# Altium PCB Booster_Board.PcbDoc
Units mil, origin at the board's own origin, x right, y up, seen from the top; angles counter-clockwise.
Board outline 6470 x 5160 mil, 2 copper layers (Top Layer, Bottom Layer); 86 components, 44 nets, 236 pads, 353 vias.
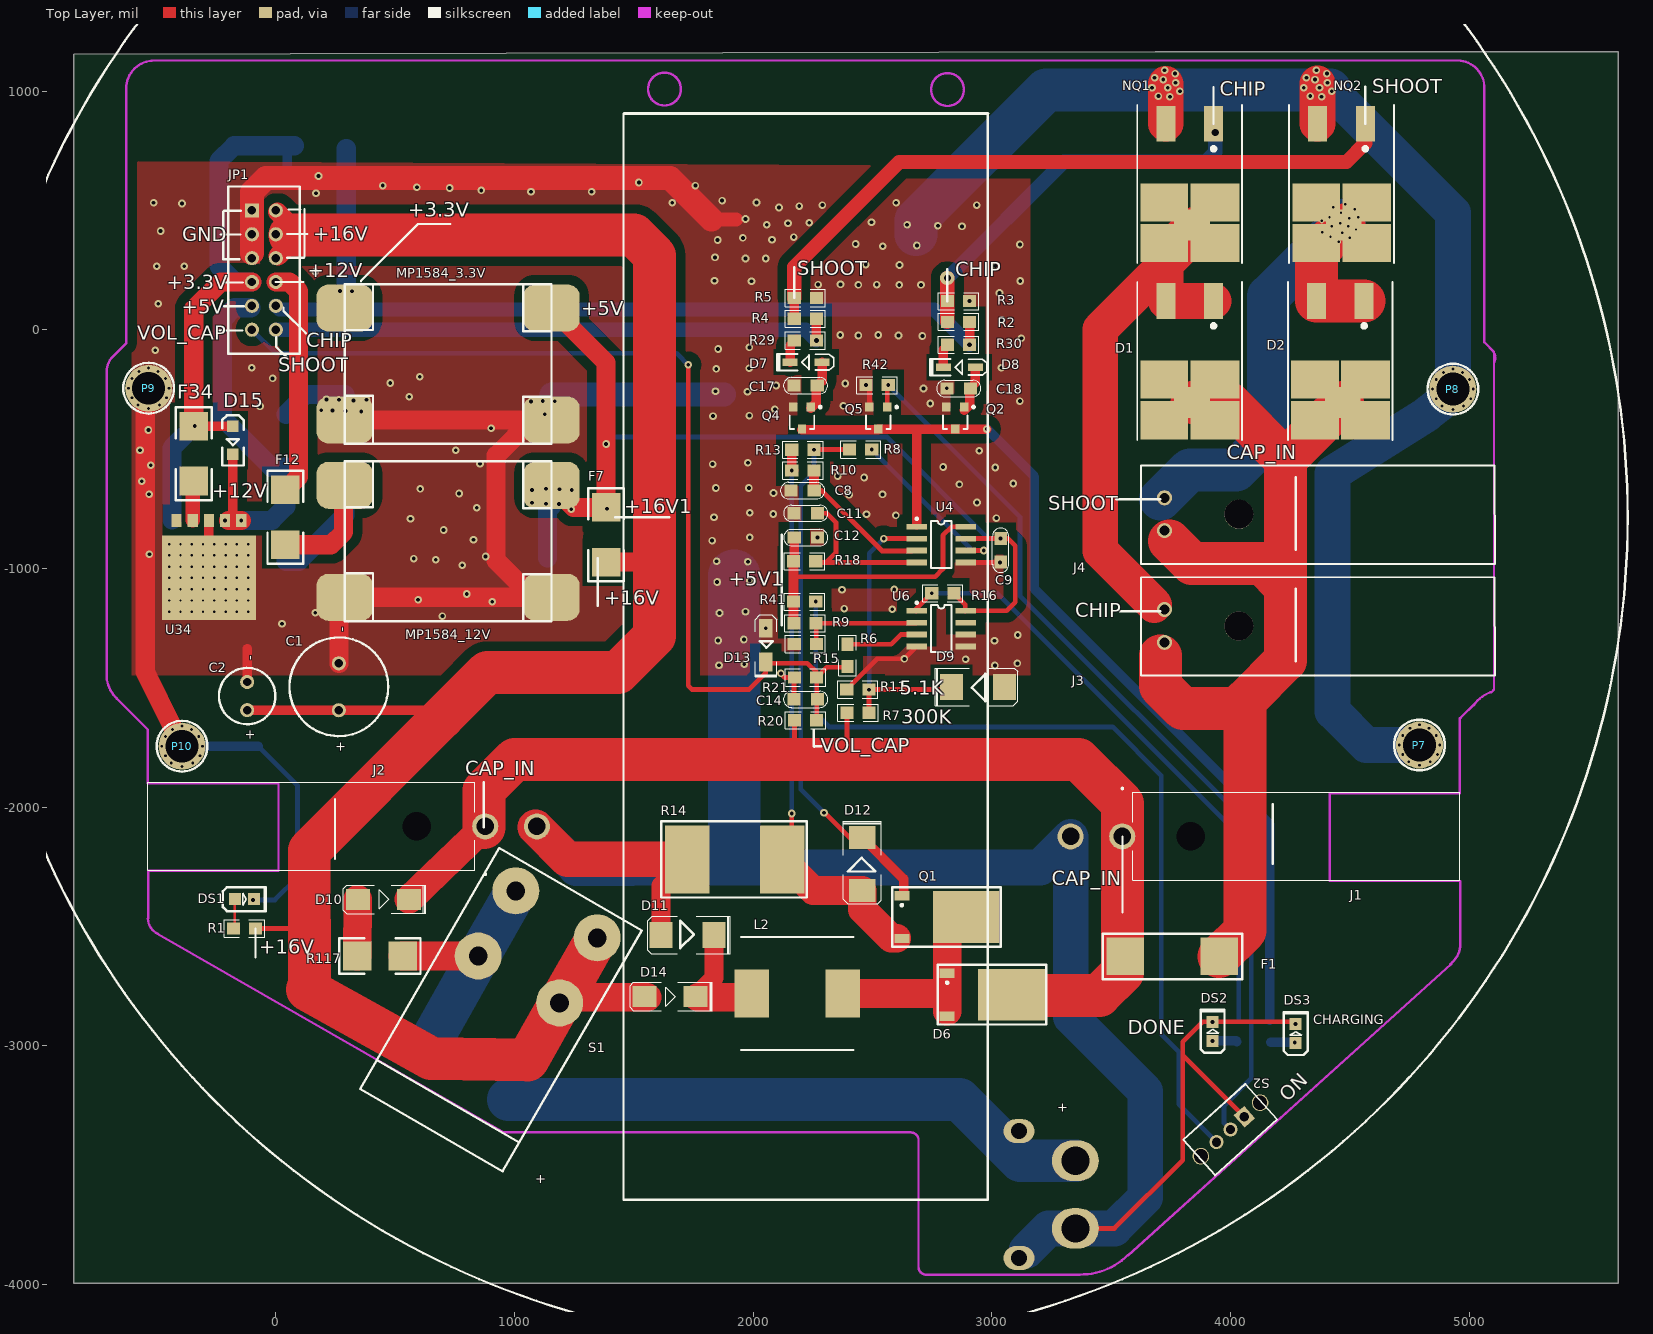
[diagram p0: Top Layer view]
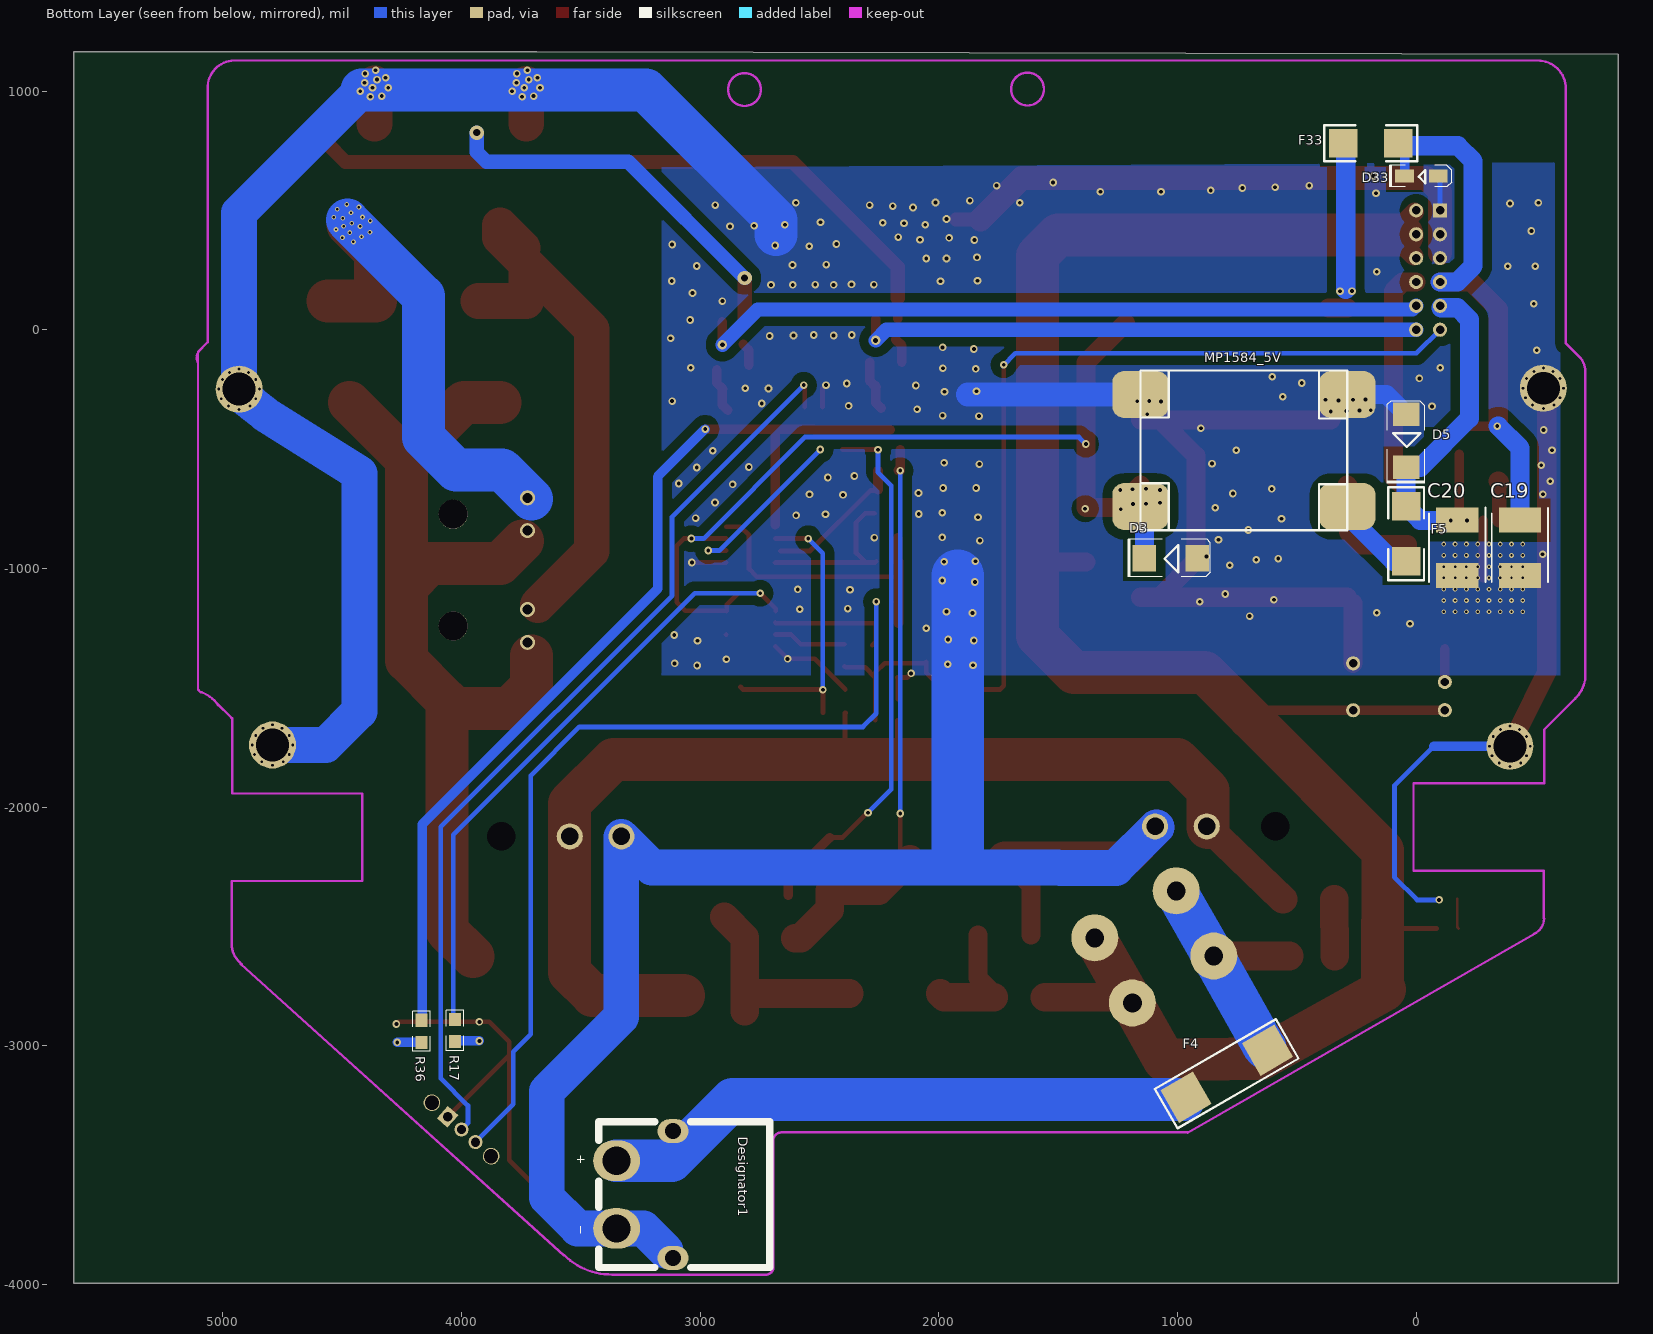
[diagram p1: Bottom Layer view, seen from below]

## Layer stack, top to bottom
Top Solder: solder mask 0.4, Solder Resist, Dk 3.5
Top Layer: signal copper 1.4
Dielectric1: dielectric 12.6, FR-4, Dk 4.8
Bottom Layer: signal copper 1.4
Bottom Solder: solder mask 0.4, Solder Resist, Dk 3.5

## Board outline
-845.99,1154 -845.99,-3996 914.01,-3996 5624.01,-3996 5624.01,-2476 5624.01,1164 3684.01,1164

## Design rules (kind name [scope] priority, off if disabled: settings)
Clearance [InNet('GND') And InPolygon] p1: gap=40 ignorepadtopadclearanceinfootprint=FALSE
Clearance Clearance_1 [All] p2: gap=10 ignorepadtopadclearanceinfootprint=FALSE except(0: Arc-Hole Track-Hole SMDPad-Hole THPad-Hole Via-Hole Fill-Hole Poly-Hole Region-Hole Text-Hole)
ComponentClearance [All] p1: gap=1 collisioncheckmode=3 verticalgap=10 showdistances=FALSE
FabricationTestPointUsage TestPointUsage [All] p1: valid=0 allowmultiple=FALSE
FabricationTestpoint Testpoint [All] p1: side=3 testpointundercomponent=TRUE minsize=40 maxsize=100 preferedsize=60 minholesize=0 maxholesize=40 preferedholesize=32 testpointgrid=1 allowsidetop=TRUE allowsidebottom=TRUE usegrid=TRUE gridtolerance=0.01
HoleSize [All] p1: absolutevalues=TRUE maxlimit=300 minlimit=1 maxpercent=80.000 minpercent=20.000
PolygonConnect [All] p1: connectstyle=Direct reliefconductorwidth=35 reliefentries=4 polygonreliefangle="90 Angle" airgapwidth=10
RoutingVias [All] p1: holewidth=28 width=50 viastyle="Through Hole" minholewidth=12 minwidth=25 maxholewidth=280 maxwidth=900
SilkToSolderMaskClearance SilkscreenOverComponentPads [IsPad] p1: minsilkscreentomaskgap=10 clearancetoexposedcopper=TRUE
SolderMaskExpansion [All] p1: expansion=4
Width [All] p1: maxlimit=300 minlimit=10 preferedwidth=80
25 further rules are at their usual default settings.

## Components (designator, comment, footprint, x,y, rotation, side; value= is the part's Value field where it differs from the comment)
C1 "330uF" 470uF 264.01,-1496 r90 top
C2 "100uf" 100uF -119.99,-1535 r90 top value=100uF
C8 "470p" 0805C 2252.01,-674.11 r180 top
C9 "0.1uF" 0805C 3037.01,-969 r90 top
C11 "2.2nf" 0805C 2265.01,-769.11 r180 top value=2.2nF
C12 "0.1uf" 0805C 2176.01,-871.11 r0 top value=0.1uF
C14 "0.1uF" 0805C 2175.01,-1548.41 r0 top
C17 "0.1uF" 0805c 2174.65,-234 r0 top
C18 "0.1uF" 0805c 2816.65,-246 r0 top
C19 "CAP470" CAPPM7360X200N -434.99,-914.14 r270 bottom
C20 "CAP470" CAPPM7360X200N -171.99,-913 r270 bottom
D1 "MBRB40250CT" D2PAK 3929.01,121 r90 top
D2 "MBRB40250CT" D2PAK 4560.01,121 r90 top
D3 "SMBJ18A" SMBJ6.5 937.01,-957 r180 bottom
D5 "SMBJ6.5CA" SMBJ6.5 42.01,-374 r90 bottom
D6 "MURD620" DPAK 2948.01,-2786 r270 top
D7 "B5819" sod-123 2289,-136 r0 top
D8 "B5819" sod-123 2931,-157 r0 top
D9 "SMBJ6.5CA" SMBJ6.5 3033.09,-1497 r0 top
D10 "M7" SMA 363.01,-2387 r180 top
D11 "SMBJ18A" SMBJ6.5 1634.01,-2536 r180 top
D12 "SMBJ18A" SMBJ6.5 2457.01,-2330.09 r270 top
D13 "SMF3.3" SMF33 2053.01,-1470.27 r90 top
D14 "M7" SMA 1564.2,-2794 r180 top
D15 "MBR120VLSFT1G SOD123" sod123 -179.99,-403.89 r270 top
D33 "SMF3.3" SMF33 126.69,644 r180 bottom
Designator1 "Comment" XT60PW 3350.23,-3477.02 r270 bottom locked
DS1 "LED2" 0805A -171.99,-2386 r0 top
DS2 "LED2" 0805A 3925.01,-2980 r90 top
DS3 "LED3" 0805A 4273.01,-2989 r90 top
F1 "20A" 20A 3684.01,-2646 r0 top
F4 "20A" 20A 741.01,-3064 r330 bottom
F5 "3A" 2512r 42.01,-740 r270 bottom
F7 "3A" 2512r 1384.01,-744 r270 top
F12 "3A" 2512r 40.01,-671 r270 top
F33 "3A" 2512r 75.01,781 r0 bottom
F34 "3A" 2512r -343.99,-634 r90 top
J1 "0768250002" 0768250002_version2 3546.61,-2123 r90 top locked
J2 "0768250002" 0768250002_version2 877.41,-2081 r270 top locked
J3 "172310-1102" 172310-1102_VERSION2 3723.59,-1309.9 r90 top locked
J4 "172310-1102" 172310-1102_VERSION2 3723.59,-841.9 r90 top locked
JP1 "Header 4X2" 2*6_2.5mm -100,500 r270 top locked
L2 "68uH" INDPM120120X1020N 2184.95,-2781 r0 top
MP1584_3.3V "MP1584" 1584 1155.01,-478 r180 top
MP1584_5V "MP1584" 1584 1155.01,-171 r180 bottom
MP1584_12V "MP1584" 1584 1155.01,-1221 r180 top
NQ1 "IPB64N25S3-20" D2PAK 3929.01,863 r90 top
NQ2 "IPB64N25S3-20" D2PAK 4565.01,863 r90 top
P7 "BNC" hole 4792,-1740 r0 top locked
P8 "BNC" hole 4932,-249 r0 top locked
P9 "BNC" hole -533,-245 r0 top locked
P10 "BNC" hole -393,-1745 r0 top locked
Q1 "IRFR12N25D" DPAK 2758.01,-2461 r270 top
Q2 "9014" SOT23A 2884.01,-324 r180 top
Q4 "9014" sot23a 2242.01,-324 r180 top
Q5 "9014" SOT23a 2561.81,-324 r180 top
R1 "10k" 0805R -177.99,-2509 r0 top
R2 "100" 0805r 2906.85,33 r180 top
R3 "10k" 0805R 2906.85,120 r180 top value=10K
R4 "100" 0805r 2264.85,46 r180 top
R5 "10k" 0805R 2264.85,133 r180 top value=10K
R6 "10K" 0805R 2395.01,-1318.11 r270 top value=10k
R7 "390K" 0805R 2486.01,-1605.11 r180 top
R8 "10" 0805R 2497.01,-502 r180 top
R9 "10K" 0805R 2264.01,-1230.11 r180 top value=10k
R10 "1k" 0805R 2162.01,-590.11 r0 top
R11 "3.3K" 0805R 2392.01,-1507.11 r0 top value=5.1K
R13 "10k" 0805R 2162.01,-503.11 r0 top
R14 "0.2" 0.2_4527R 1723.37,-2219 r0 top
R15 "1k" 0805R 2265.01,-1317.11 r180 top
R16 "4.7k" 0805R 2748.01,-1104.11 r0 top
R17 "4.7k" 0805R 4027.01,-2983 r90 bottom
R18 "27k" 0805R 2262.01,-970.11 r180 top
R20 "1m" 0805R 2266.01,-1636.41 r180 top value=1M
R21 "10k" 0805R 2173.01,-1457.41 r0 top value=10K
R29 "10K" 0805r 2171.85,-45 r0 top
R30 "10K" 0805r 2906.85,-63 r180 top
R36 "4.7K" 0805r 4168.01,-2986 r90 bottom value=4.7k
R41 "10k" 0805r 2262.01,-1139.11 r180 top
R42 "10k" 0805r 2566.01,-232 r180 top
R117 "20" 20_2512r 321.32,-2624 r0 top
S1 "power" Rocker_Switch 1005.49,-2351.24 r330 top locked
S2 "SW-SPDT" SMALL_switch 4058.52,-3298.31 r312 top
U4 "UC3843P" SO-G8 2788.01,-900.11 r270 top
U6 "LM393" LM393_SO-G8 2788.01,-1252.11 r270 top
U34 "BA33DD0WHFP" HRP5_16TO5 -279.99,-1040 r180 top

## Footprints (in the part's own frame and the unit in brackets; to place one, negate y for a bottom-side part, rotate by r counter-clockwise, add the part's x,y. Pads: shape width x height; smd on the part's side, far side on the other; paste and mask are expansions set on the pad)
0.2_4527R [mm]
  rect 4.74x7.25 smd: 1(0,0) 2(10.1,0)
  silkscreen extent -2.77,-4.06 12.72,4.06
2*6_2.5mm [mm] "16V 12V 5V 3.3V"
  rect 1.5x1.5 hole 0.9: 1(0,0)
  round 1.5 hole 0.9: 2(0,2.54) 3(2.54,0) 4(2.54,2.54) 5(5.08,0) 6(5.08,2.54) 7(7.62,0) 8(7.62,2.54) 9(10.16,0) 10(10.16,2.54) 11(12.7,0) 12(12.7,2.54)
  silkscreen extent -2.54,-2.54 15.24,5.08
20_2512r [mil] "Chip Resistor; Body 6.3 x 3.2 mm (LxW typ)"
  rect 120x120 smd: 1(19.68,0) 2(210.32,0)
  silkscreen extent -55,-75 285,75
20A [mm]
  rect 4x4 smd: 1(-3.175,0.508) 2(6.825,0.508)
  silkscreen extent -5.59,-1.91 9.27,2.92
100uF [mm] "6*12"
  round 1.5 hole 0.9: 1(-1.5,0) 2(1.5,0)
  silkscreen extent -3,-3 3,3
470uF [mm] "Capacitor (Radial); 2 Leads"
  round 1.5 hole 0.9: 1(-2.5,0) 2(2.5,0)
  silkscreen extent -5.25,-5.25 5.25,5.25
0805A [mil]
  rect 50x50 smd: 1(0,0) 2(80,0)
  silkscreen extent -50,-50 130,50
0805C [mm]
  rect 1.4x1.3 smd: 1(-0.102,0) 2(2.388,0)
  silkscreen extent -1.22,-0.88 3.49,0.87
0805c [mm]
  rect 1.4x1.3 smd: 1(-0.102,0) 2(2.388,0)
  silkscreen extent -1.22,-0.88 3.49,0.87
0805R [mm]
  rect 1.4x1.3 smd: 1(0,0) 2(2.362,0)
  silkscreen extent -0.97,-0.91 3.33,0.91
0805r [mm]
  rect 1.4x1.3 smd: 1(0,0) 2(2.362,0)
  silkscreen extent -0.97,-0.91 3.33,0.91
1584 [mm] "5V   3.3V 12V稳压模块"
  rrect50% 6x5 smd: 1(0,-2.54) 2(0,-14.46) 3(22,-14.46) 4(22,-2.54)
  silkscreen extent 0,-17 22,0
2512r [mil] "Chip Resistor; Body 6.3 x 3.2 mm (L"
  rect 120x120 smd: 1(0,0) 2(230,0)
  silkscreen extent -80,-75 310,75
172310-1102_VERSION2 [mm]
  round 1.61 hole 1.06: 1(0,0) 2(3.5,0)
  round 3.09 hole 3.09: MH1(1.75,-7.91)
  silkscreen extent -3.54,-35.16 6.93,2.5
0768250002_version2 [mm]
  round 2.775 hole 1.85: 1(0,0) 2(0,5.5)
  round 1.525 hole 3.05: MH1(0,-7.3)
  silkscreen extent -4.68,-35.93 5.2,0.1
CAPPM7360X200N [mm] "470uF贴片"
  rect 2.65x4.5 smd: 1(-2.95,0) 2(2.95,0)
  silkscreen extent -4.28,-3 3.65,3, body extent -3.65,-3 3.65,3, height 2
D2PAK [mil]
  rect 150x80 smd: 1(0,0) 3(0,200)
  rect 160x205 smd: 2(-500,-6) 2(-330,-6)
  rect 160x200 smd: 2(-500,206) 2(-330,206)
  rect 130x150 smd: 2(-425,90)
  silkscreen extent -583,-119 79,319
DPAK [mm] "D-PAK/TO-252-AA;"
  rect 1x1.6 smd: 1(-2.285,-3.425) 3(2.285,-3.425)
  rect 5.5x7.1 smd: 2(0,3.425)
  silkscreen extent -3.18,-4.45 3.18,7.11
hole [mm]
  round 5 hole 3.5: 1(0,0)
  silkscreen extent -2.7,-2.7 2.7,2.7
HRP5_16TO5 [mm]
  rect 1.07x1.37 smd: 1(-3.429,-6.125) 2(-1.709,-6.125) 3(0.011,-6.125) 4(1.731,-6.125) 5(3.451,-6.125)
  rect 10x9 smd: FIN(0,0)
INDPM120120X1020N [mm]
  rect 3.65x5.1 smd: 1(-4.85,0) 2(4.85,0)
  silkscreen extent -6,-6 6,6, body extent -6,-6 6,6, height 10.2
LM393_SO-G8 [mm] "Small Outline; 8 Leads; Body Width 3.9 mm; Pitch 1.27 mm"
  rect 0.6x2.2 smd: 1(-1.905,-2.6) 2(-0.635,-2.6) 3(0.635,-2.6) 4(1.905,-2.6) 5(1.905,2.6) 6(0.635,2.6) 7(-0.635,2.6) 8(-1.905,2.6)
  silkscreen extent -2.88,-2.72 2.5,1.1
Rocker_Switch [mm]
  round 5 hole 2: 1(10,0) 2(0,0) 3(10,-8) 4(0,-8)
  silkscreen extent -3.81,-26.55 13.72,3.05
SMA [mm]
  rect 2.56x2.2 smd: 1(0.5,0) 2(-4.948,0)
  silkscreen extent -6.73,-1.5 2.03,1.5
SMALL_switch [mm] "开关"
  round 1.778 hole 1.5: 0(0,2.25) 0(0,-6.25)
  rect 1.778x1.5 hole 1: 1(0,0)
  round 1.5 hole 1: 2(0,-2) 3(0,-4)
  silkscreen extent -2.54,-6.48 2.54,2.41
SMBJ6.5 [mm]
  rect 2.475x2.8 smd: 1(0.5,0) 2(-5.133,0)
  silkscreen extent -6.85,-2 1.91,2
SMF33 [mm] "TVS 二极管 3.3V"
  rect 2x1.4 smd: 1(5.58,0) 2(1.988,0)
  silkscreen extent 0.39,-1.14 6.98,1.14
SO-G8 [mm]
  rect 0.6x2.2 smd: 1(-1.905,-2.6) 2(-0.635,-2.6) 3(0.635,-2.6) 4(1.905,-2.6) 5(1.905,2.6) 6(0.635,2.6) 7(-0.635,2.6) 8(-1.905,2.6)
  silkscreen extent -2.88,-2.72 2.5,1.1
sod123 [mm]
  rect 1.25x1.22 smd: 1(0,0) 2(3,0)
  silkscreen extent -1.14,-1.14 4.19,1.14
sod-123 [mm]
  rect 1.6x0.8 smd: 1(0,0) 2(-3.4,0)
  silkscreen extent -4.83,-0.89 1.24,0.89
SOT23A [mm] "SOT-23; 3 Leads; Body 3.0 x 2.5 mm, inc. leads (LxW max)"
  rect 0.9x0.95 smd: 1(0,0) 2(1.9,0) 3(0.95,2.35)
  silkscreen extent -1.13,-0.12 2.25,2.35
sot23a [mm] "SOT-23; 3 Leads; Body 3.0 x 2.5 mm, inc. leads (LxW max)"
  rect 0.9x0.95 smd: 1(0,0) 2(1.9,0) 3(0.95,2.35)
  silkscreen extent -1.13,-0.12 2.25,2.35
SOT23a [mm] "SOT-23; 3 Leads; Body 3.0 x 2.5 mm, inc. leads (LxW max)"
  rect 0.9x0.95 smd: 1(0,0) 2(1.9,0) 3(0.95,2.35)
  silkscreen extent -1.13,-0.12 2.25,2.35
XT60PW [mm]
  oval 4.318x5 hole 3: 1(7.327,0) 2(0.127,0)
  oval 2.54x3.302 hole 1.7: 1(10.477,6) 2(-3.023,6)
  silkscreen extent -4.02,-4.17 11.48,16.29, body extent -4.04,-1.51 11.46,16.69, height 8.4

## Part data
C1: library part Cap2, "Capacitor", Published=23-Sep-2002, Publisher="Altium Limited"
C2: library part "Cap Pol1", "Polarized Capacitor (Radial)", Manufacturer="Generic Components", Class=Passive, Published=08/06/2000, Publisher="Altium Hobart Technology Centre", SubClass=Capacitor
C8 C11 C12: library part Cap, "Capacitor", Manufacturer="Generic Components", Class=Passive, Published=08/06/2000, Publisher="Altium Hobart Technology Centre", SubClass=Capacitor
C9 C14 C17 C18: library part Cap, "Capacitor", LatestRevisionDate=17-Jul-2002, LatestRevisionNote="Re-released for DXP Platform.", Published=8-Jun-2000, Publisher="Altium Limited"
C19 C20: library part T523H477M016APE0707280, "470uF电容贴片", Manufacturer_Name=Kemet, Mouser Part Number=80-T523H477M16P070LR, Datasheet Link=https://api.kemet.com/component-edge/download/datasheet/T523H477M016APE0707280.pdf, Height=2mm, Manufacturer_Part_Number=T523H477M016APE0707280, Mouser Price/Stock=https://www.mouser.com/Search/Refine.aspx?Keyword=80-T523H477M16P070LR
D1 D2 D6: library part MBRB1545CT, "Schottky Rectifier", Manufacturer="International Rectifier", Class=Discrete, Note="Terminal 2 is the TAB and is electrically connected to the cathode", Published=8/06/2000, Publisher="Altium Hobart Technology Centre", SubClass="Rectifier - Schottky"
D3 D5 D7 D8 D9 D11 D12 D13 D33: library part "D Zener", "Zener Diode", LatestRevisionDate=17-Jul-2002, LatestRevisionNote="Re-released for DXP Platform.", PackageReference=DIODE-0.7, Published=8-Jun-2000, Publisher="Altium Limited"
D10 D14 D15: library part Diode, "Default Diode", Manufacturer="Generic Components", Class=Discrete, Published=08/06/2000, Publisher="Altium Hobart Technology Centre", SubClass="Diode - Switching"
Designator1: library part "Header 2", "Header, 2-Pin", LatestRevisionDate=17-Jul-2002, LatestRevisionNote="Re-released for DXP Platform.", Publisher="Altium Limited"
DS1: "Typical RED, GREEN, YELLOW, AMBER GaAs LED", COLOUR=GREEN, Manufacturer="Generic Components", Class=Optoelectronic, Published=08/06/2000, Publisher="Altium Hobart Technology Centre", SubClass=LED
DS2: "Typical RED, GREEN, YELLOW, AMBER GaAs LED", Manufacturer="Generic Components", Class=Optoelectronic, Published=08/06/2000, Publisher="Altium Hobart Technology Centre", SubClass=LED
DS3: library part LED2, "Typical RED, GREEN, YELLOW, AMBER GaAs LED", COLOUR=GREEN, PackageDocument=Feb-2002, LatestRevisionDate=17-Jul-2002, LatestRevisionNote="Re-released for DXP Platform.", PackageReference=3.2X1.6X1.1, Published=8-Jun-2000, Publisher="Altium Limited"
F1: library part "Fuse 2", LatestRevisionDate=17-Jul-2002, LatestRevisionNote="Re-released for DXP Platform.", Published=8-Jun-2000, Publisher="Altium Limited"
F4: library part "Fuse 1", "Fuse", LatestRevisionDate=17-Jul-2002, LatestRevisionNote="Re-released for DXP Platform.", PackageReference=PIN-W2/E2.8, Published=8-Jun-2000, Publisher="Altium Limited"
F5 F7 F12 F33 R1 R6 R7 R8 R9 R10 R11 R13 R14 R15 R16 R17 R18 R20 R21 R29 R30 R36 R41 R42 R117: library part Res1, "Resistor", Manufacturer="Generic Components", Class=Passive, Published=08/06/2000, Publisher="Altium Hobart Technology Centre", SubClass=Resistor
F34: library part Res1, "Resistor", LatestRevisionDate=17-Jul-2002, LatestRevisionNote="Re-released for DXP Platform.", Published=8-Jun-2000, Publisher="Altium Limited"
J1 J2: "Connector", Manufacturer_Name=Molex, Mouser Part Number=N/A, Datasheet Link=https://www.molex.com/pdm_docs/sd/768250002_sd.pdf, Height=16mm, Manufacturer_Part_Number=0768250002, Mouser Price/Stock=https://www.mouser.com/Search/Refine.aspx?Keyword=N%2FA
J3 J4: "Connector", Manufacturer_Name=Molex, Mouser Part Number=538-172310-1102, RS Part Number=8951880, Allied_Number=70617676, Allied Price/Stock=http://www.alliedelec.com/molex-incorporated-172310-1102/70617676/, Datasheet Link=http://www.farnell.com/cad/1986622.pdf, Manufacturer_Part_Number=172310-1102, Mouser Price/Stock=https://www.mouser.com/Search/Refine.aspx?Keyword=538-172310-1102, RS Price/Stock=http://uk.rs-online.com/web/p/products/8951880
JP1: library part "Header 6X2", "Header, 4-Pin, Dual row", LatestRevisionDate=17-Jul-2002, LatestRevisionNote="Re-released for DXP Platform.", Publisher="Altium Limited"
L2: library part Inductor, "Inductor", Code_IEC=1005, Code_JEITA=0402, LatestRevisionDate=17-Jul-2002, LatestRevisionNote="Re-released for DXP Platform.", PackageReference=0402-A, Published=8-Jun-2000, Publisher="Altium Limited"
NQ1 NQ2: library part IRFP460, "HEXFET Power MOSFET", Manufacturer="International Rectifier", Class=Discrete, Note="Pin 2 is electrically connected to the Heatsink (4).", Published=8/06/2000, Publisher="Altium Hobart Technology Centre", SubClass="MOSFET - Power"
P7 P8 P9 P10: "BNC Elbow Connector", LatestRevisionDate=17-Jul-2002, LatestRevisionNote="Re-released for DXP Platform.", Publisher="Altium Limited"
Q1: library part NMOS-2, "N-Channel Power MOSFET", Code_JEDEC=TO-220-AB, DatasheetDocument=PD-9.814, LatestRevisionDate=17-Jul-2002, LatestRevisionNote="Re-released for DXP Platform.", Note="Pin 2 is electrically connected to pin 4.", PackageReference=TO-220AB, Published=8-Jun-2000, Publisher="Altium Limited"
Q2 Q4 Q5: library part BC817-40, "NPN General Purpose Amplifier", Manufacturer="Fairchild Semiconductor", Class=Discrete, Published=8/06/2000, Publisher="Altium Hobart Technology Centre", Revised="11-July-2000: SIM Model Added.", SubClass="BJT - Low Power"
R2 R3 R4 R5: library part "Res Semi", "Semiconductor Resistor", Manufacturer="Generic Components", Class=Passive, Published=08/06/2000, Publisher="Altium Hobart Technology Centre", SubClass=Resistor
S1: library part "Header 2X2", "Header, 2-Pin, Dual row", LatestRevisionDate=17-Jul-2002, LatestRevisionNote="Re-released for DXP Platform.", Publisher="Altium Limited"
S2: "SPDT Subminiature Toggle Switch, Right Angle Mounting, Vertical Actuation", ComponentLink1Description="Manufacturer Link", ComponentLink1URL=http://www.apem.com, DatasheetDocument=05-Dec-2000, LatestRevisionDate=17-Dec-2003, LatestRevisionNote="Schematic revised, PCB Footprint replaced.", PackageReference=TL36WW15050, Published=24-Mar-1999, Publisher="Altium Limited"
U4: "Current-Mode PWM Controller", PackageDocument=Jun-1999, Code_JEDEC=MO-001-AN, ComponentLink1Description="Manufacturer Link", ComponentLink1URL=http://www.ti.com/, DatasheetDocument=Dec-1999, LatestRevisionDate=6-Jun-2005, LatestRevisionNote="Stylized 3D Model Added.", PackageReference=P008, Published=15-Apr-2002, Publisher="Altium Limited"
U34: library part HRP5-16TO5

## Via types
v1: diameter 32, hole 16, Top Layer to Bottom Layer, 228 vias
v2: diameter 20, hole 10, Top Layer to Bottom Layer, 73 vias
v3: diameter 25, hole 12, Top Layer to Bottom Layer, 48 vias
v4: diameter 60, hole 30, Top Layer to Bottom Layer, 2 vias
v5: diameter 40, hole 20, Top Layer to Bottom Layer, 2 vias

## Nets (pads, with @x,y where several pads share a name; then routed paths per layer and width w, separated by ;. In a path a pad name is that pad's centre, name@x,y a point inside that pad or via, vN(x,y) a via of type N, cw(c..) or ccw(c..) an arc to the next point about the centre after c; other vN are vias at no path point)
+3.3V: C19.1 D15.1 D33.2 F33.1 F34.2 JP1.7 | length 2474.8
  Top Layer w40: F34.2 -343.88,-403.89 D15.1
  Top Layer w80: F34.2 -343.99,87 -230.99,200 JP1.7
  Bottom Layer w40: D33.2 48.43,754.42 65.01,771 F33.1
  Bottom Layer w80: C19.1 -434.99,-495 v1@-343.99,-404 ; JP1.7 -171.99,200 -238.99,267 -238.99,707 -174.99,771 65.01,771 F33.1@77.01,771
  other v1: -339.99,-403.89
+5V: C20.1 D5.2 D15.2 F5.1 JP1.9 U34.1 U34.2 | length 1573.4
  Top Layer w40: -179.99,-763.86 D15.2
  Top Layer w80: U34.2@-197.99,-798.86 v1(-144.99,-798.86)
  Bottom Layer w80: v1(-144.99,-798.86) -16.85,-798.86 F5.1 D5.2 -17.91,-576.09 -222.99,-371 -222.99,43 -173.99,92 JP1.9@-103.99,92
  other v1: -212.71,-798.86
+5V1: C12.1 R9.2 R18.2 R41.2 U4.8 | length 1261.4
  Top Layer w20: R9.2@2169.01,-1230.11 R9.2@2170.01,-1231.11 ; 2169.01,-1035 2762.12,-1035 2795.01,-1002.11 2795.01,-862.11 2832.01,-825.11 U4.8
  Top Layer w40: R9.2@2169.01,-1230.11 R41.2 ; R18.2 2169.01,-1035 2169.01,-1137.11 R41.2@2173.01,-1141.11 ; R18.2@2172.01,-977.11 C12.1
+12V: F12.1 JP1.8 | length 966.5
  Top Layer w80: JP1.8 57.01,200 95.01,162 95.01,-616 F12.1
+16V: C1.1 C2.1 D14.1 F7.2 JP1.2 JP1.4 JP1.6 R1.2 S1.1 S1.3 | length 8987.1
  Top Layer w20: R1.2 79.21,-2509
  Top Layer w40: C2.1 -119.62,-1594.43 C1.1 667.43,-1594.43 697.51,-1624.5 ; 79.21,-2509 89.19,-2499.02 ; 1569.01,-974 1587.01,-992
  Top Layer w80: JP1.2@7.5,492.5 82,418 60.01,396 75.01,381 75.01,375.01 JP1.6@9,309 ; F7.2 1569.01,-974
  Top Layer w120: S1.3@1190.4,-2821.66 1215.07,-2797 D14.1@1555.32,-2797
  Top Layer w180: 60.01,396 1501.01,396 1587.01,310 1587.01,-992 1587.01,-1283 1434.01,-1436 886.01,-1436 697.51,-1624.5 140.01,-2182 140.13,-2756.9 ; 131.82,-2765.21 134.64,-2766.78 651.01,-3053.59 1055.01,-3059 S1.3 ; S1.3@1190.4,-2821.66 S1.1@1345.7,-2547.67
+16V1: C9.2 D3.2 F7.1 MP1584_3.3V.2 MP1584_5V.2 MP1584_12V.2 R16.2 U4.7 U6.8 | length 3944.5
  Top Layer w20: R16.2 2888.37,-1151.47 U6.8@2888.37,-1178.11 ; U6.8 3062.74,-1177.11 3098.01,-1141.84 3098.01,-905 3068.01,-875 v1(3037.01,-875) 3036.9,-875.11 U4.7
  Top Layer w80: MP1584_12V.2 1247.3,-744 F7.1 v1(1384.01,-479) 1384.01,-137.71 MP1584_3.3V.2@1218.65,27.65
  Bottom Layer w20: v1(1384.01,-479) 1413.01,-450 2561.01,-450 2986.01,-875 v1(3037.01,-875)
  Bottom Layer w80: D3.2 1139.09,-756.2 MP1584_5V.2
  other v1: 1238.01,-752 1387.01,-749.91 1187.01,-730 1132.01,-729 1073.01,-725 1240.01,-672 1073.01,-671 1188.96,-668 1132.01,-666
BATTERY: Designator1.2 F4.2 | length 2482.7
  Bottom Layer w180: F4.2@974.01,-3225 2864.01,-3225 3121.02,-3482.02 Designator1.2@3350.23,-3482.02
BATTERY_IN: F4.1 R117.2 S1.2 S1.4 | length 1058
  Top Layer w120: R117.2 S1.4
  Bottom Layer w180: F4.1@634.23,-3007.63 850.77,-2625.57 S1.2@999.92,-2362.42
CHIP: JP1.10 R2.1 R30.1 | length 3058.2
  Top Layer w40: R30.1@2906.85,-50.85 R2.1
  Bottom Layer w60: JP1.10 15,85 2758.85,85 v5(2906.85,-63)
CMPEN: Q2.3 Q4.3 Q5.3 R36.2 U4.1 | length 4143.4
  Top Layer w20: 2683.65,-416.52 2685.65,-418.52
  Top Layer w40: Q4.3@2204.61,-418.52 Q5.3@2524.41,-418.52 ; Q5.3 2683.65,-416.52 Q2.3 v1(2979.01,-416.52) ; U4.1@2685.65,-817 2685.65,-418.52
  Bottom Layer w40: v1(2979.01,-416.52) 3178.01,-615.52 3178.01,-1086 4165.01,-2073 R36.2@4165.01,-2893
COIL_CHIP: D1.1 D1.3 J3.2 NQ1.2 | length 2335
  Top Layer w150: 3680.25,-1152.76 3454.01,-926.52 3454.01,2 3729.01,277 ; NQ1.2@3743.51,342.5 3839.01,438 3839.01,387 3729.01,277 ; D1.1 D1.3 3729.01,277
COIL_SHOOT: D2.1 D2.3 J4.2 NQ2.2 | length 2167.1
  Top Layer w180: NQ2.2@4475.01,438 4360.01,323 D2.3 D2.1
  Bottom Layer w180: J4.2@3706.59,-710.1 3829.69,-587 4024.01,-587 4160.01,-451 4160.01,141 4478.01,459
  other v2: 4453.01,368 4499.01,386 4419.01,390 4468.01,407 4384.01,408 4526.01,420 4425.01,433 4494.01,434 4460.01,446 4382.01,456 4498.01,467 4535.01,471 4415.01,472 4463.01,490 4521.01,505 4430.01,514 4481.01,525
CURRENT: C8.1 R10.2 U4.3 | length 592.2
  Top Layer w20: C8.1 2287.01,-674.11 2540.01,-927.11 U4.3@2663.01,-927.11
  Top Layer w40: C8.1@2254.01,-670.11 2255.01,-669.11 R10.2
GND: C1.2 C2.2 C8.2 C9.1 C11.2 C12.2 C14.1 C17.1 C18.1 C19.2 C20.2 D3.1 D5.1 D9.1 D11.1 D13.1 D33.1 Designator1.1 DS1.2 DS2.2 DS3.2 J1.2 J2.2 JP1.1 JP1.3 JP1.5 MP1584_3.3V.1 MP1584_3.3V.4 MP1584_5V.1 MP1584_5V.4 MP1584_12V.1 MP1584_12V.4 NQ1.3 NQ2.3 P7.1 P8.1 P9.1 P10.1 Q2.2 Q4.2 Q5.2 R3.1 R5.1 R11.1 R14.1 R15.2 R21.1 R42.2 S2.1 U4.5 U6.4 U6.5 U6.6 U34.3 U34.FIN | length 24948.5
  Top Layer w20: P10.1 P10.1@-366.99,-1771 ; U34.FIN@-280.43,-1039.57 U34.FIN ; v1(2116.01,-1440) 2133.42,-1457.41 R21.1 2171.01,-1459.41 C14.1 ; R11.1 2520.12,-1379 v1(2633.76,-1379) U6.4 ; v1(2473.01,-232) 2487.01,-246 Q5.2 ; U6.6 U6.6@2891.69,-1278.43 ; U4.5 v1(3034.9,-975.11) C9.1 ; Designator1.1@3350.23,-3765.48 3513.53,-3765.48 3800.01,-3479 3800.01,-3039.8 ; S2.1 3800.01,-3039.8 ; v1(4273.01,-2909) 4264.01,-2900 v1(3925.01,-2900) 3884.01,-2900 3800.01,-2984 3800.01,-3039.8
  Top Layer w40: U34.FIN@-280.43,-1039.57 -280.43,-898.27 U34.3 ; C2.2 -119.99,-1336
  Top Layer w60: MP1584_12V.4@264.01,-1145.86 MP1584_12V.4 ; 1826.01,462 1928.01,462
  Top Layer w80: P9.1@-546.99,-199.61 -546.99,-420 -546.99,-568 -546.99,-1433 -428.61,-1672.83 -426.73,-1676.65 -422.58,-1685.05 P10.1 ; C1.2 MP1584_12V.4@264.01,-1145.86 ; MP1584_12V.4 MP1584_12V.1@1077.01,-1121 ; MP1584_3.3V.4@358.01,-378 MP1584_3.3V.1@1072.49,-378 ; MP1584_12V.1 MP1584_12V.1@1077.01,-1121 ; MP1584_3.3V.1 MP1584_3.3V.1@1072.49,-378 ; D11.1 1614.32,-2328.05 R14.1 ; MP1584_3.3V.1@1072.49,-378 923.01,-527.48 923.01,-967 MP1584_12V.1@1077.01,-1121
  Top Layer w100: JP1.5@-100,322 JP1.3 JP1.1 -100,577.31 -41.31,636 178.55,636 1323.01,636 1652.01,636 1826.01,462
  Top Layer w150: J2.2@1087.94,-2085 1221.94,-2219 R14.1 ; NQ1.3 3729.01,979 3729.01,1030 ; NQ2.3 4365.01,979 4365.01,1032
  Bottom Layer w20: P10.1 v3(-308,-1745) ; JP1.1 -100,636.99 D33.1 ; v1(-95.99,-2389) -3.99,-2389 91.01,-2294 91.01,-1910 -73.99,-1745
  Bottom Layer w40: v3(-308,-1745) -73.99,-1745
  Bottom Layer w80: D5.1 125.32,-271 MP1584_5V.4
  Bottom Layer w100: MP1584_5V.1 1879.01,-271
  Bottom Layer w150: J2.2@1087.94,-2085 1257.94,-2255 1491.01,-2255 ; 1503.01,-2253 3203.07,-2253 3331.07,-2125 3331.07,-2879.06 3643.01,-3191 3643.01,-3636 3513.53,-3765.48 3350.23,-3765.48 3238.02,-3765.48 Designator1.1@3144.76,-3858.75 ; v1@4418.01,1004 4932.01,490 4932.01,-264 4931.69,-251.06 4931.65,-249.01 4931.6,-246.95 4931.02,-223 4930.63,-224.67 4925.42,-247.5 4921.21,-265.94 4918.58,-277.47 4899.23,-292.9 4888.7,-301.3 P8.1@4879.03,-309.01 ; P7.1 v3(4707,-1740) 4569.01,-1740 4428.01,-1599 4428.01,-601.78 4823.41,-353.36 4878.37,-309.53 P8.1@4879.03,-309.01
  Bottom Layer w180: 2683.01,398 2683.01,460 3227.01,1004 3671.01,1004 3737.01,1004 4307.01,1004 4404.01,1004 v1@4418.01,1004
  Bottom Layer w220: 1920.01,-2171 1920.01,-1298 1920.01,-1181 1920.01,-1051 1920.01,-1030
  other v1: 3013.01,-1407 1857.01,-1406 1963.01,-1402 3107.01,-1398 2890.37,-1381 3011.01,-1303 1853.01,-1302 1961.01,-1298 3109.01,-1279 2053.01,-1250.58 26.01,-1232 698.01,-1200 1859.01,-1187 165.01,-1186 1968.01,-1181 2583.01,-1171 2382.01,-1168.47 907.01,-1140 596.01,-1131 800.01,-1107 2372.01,-1089.49 2591.01,-1088 1849.01,-1057 1985.45,-1051 781.24,-987 1977.84,-972.17 1847.01,-970.11 670.01,-964 578.01,-959 879.01,-950 -529.99,-941 1828.01,-883.73 828.01,-880 2270.01,-871.11 1985.45,-870 703.01,-839 564.01,-792 3019.01,-789.45 1836.01,-786 2598.01,-778 2475.01,-773 2084.01,-772 1985.45,-767 842.01,-746 2938.01,-724 2401.33,-691.84 2542.01,-690 -530.99,-689 768.01,-686 2085.01,-684 605.01,-667 1844.01,-663 1982.01,-663 2864.29,-648 3090.01,-644 -561.99,-635 2465.01,-619 2354.01,-613 3014.01,-577 2796.01,-575 -523.99,-568 1830.01,-563 855.51,-561 1977.84,-557 2947.01,-507 -568.99,-505 754.01,-505 -533.99,-420 902.01,-413 1832.01,-362 1984.01,-360 1127.01,-354 358.01,-342 292.01,-340 238.01,-339 190.01,-337 2091.01,-333 -66.15,-321 2378.01,-319 2742.01,-309 1069.01,-301 1169.01,-300 1118.01,-299 3117.72,-299 325.01,-297 264.01,-293 380.01,-293 212.01,-292 559.01,-281.15 1976.01,-260 1842.01,-258 2714.01,-246 2811.01,-245 2096.01,-233.77 2386.01,-225 479.01,-223 -13.63,-204 603.01,-197 1845.01,-164 1983.01,-161 -100.57,-159 3039.3,-159 -504.99,-86 1853.01,-81 1984.01,-74 3124.01,-36 2709.01,-26 2441.01,-24 2609.01,-24 2365.01,-22 2524.01,-22 3042.01,41 -492.99,109 2906.85,120 3032.01,154 2441.01,188 2612.01,188 2703.01,188 2272.01,189 2518.01,189 2366.01,190 1993.01,203 3119.01,204 1838.01,205 165.01,243 -498.99,266 -383.99,266 3014.01,267 2613.01,271 2472.01,273 1968.01,298.51 2053.01,298.51 1840.01,303 2543.01,350 2686.01,353 3117.72,357 2429.33,359 1851.01,376 2079.01,377 1957.01,385 2170.01,388 -482.99,413.63 2875.01,433 2773.91,436 2057.01,440 2645.01,440 2146.15,446 2235.01,448 2496.01,450 1968.01,464 2108.01,512 2193.01,518 2290.01,522 2937.01,522 -392.99,529 -511.99,532 1661.01,532 2599.01,532 2014.01,533 1870.01,541 168.01,572 1069.01,578 1323.01,578 861.01,584 728.01,594 591.01,597 448.01,604 1758.01,604 1521.01,617 178.55,644 3746.01,976 4382.01,976 3698.01,979 4334.01,979 3788.01,999 4424.01,999 3671.01,1014 3737.01,1014 4307.01,1014 4373.01,1014 3770.01,1035 4406.01,1035 3718.01,1048 4354.01,1048 3682.01,1056 4318.01,1056 3768.01,1073 4404.01,1073 3724.01,1087 4360.01,1087
  other v2: -446.72,-1181.73 -399.48,-1181.73 -352.24,-1181.73 -304.99,-1181.73 -257.75,-1181.73 -210.5,-1181.73 -163.26,-1181.73 -116.02,-1181.73 -446.72,-1134.49 -399.48,-1134.49 -352.24,-1134.49 -304.99,-1134.49 -257.75,-1134.49 -210.5,-1134.49 -163.26,-1134.49 -116.02,-1134.49 -446.72,-1087.24 -399.48,-1087.24 -352.24,-1087.24 -304.99,-1087.24 -257.75,-1087.24 -210.5,-1087.24 -163.26,-1087.24 -116.02,-1087.24 -446.72,-1040 -399.48,-1040 -352.24,-1040 -304.99,-1040 -257.75,-1040 -210.5,-1040 -163.26,-1040 -116.02,-1040 -446.72,-992.76 -399.48,-992.76 -352.24,-992.76 -304.99,-992.76 -257.75,-992.76 -210.5,-992.76 -163.26,-992.76 -116.02,-992.76 -446.72,-945.51 -399.48,-945.51 -352.24,-945.51 -304.99,-945.51 -257.75,-945.51 -210.5,-945.51 -163.26,-945.51 -116.02,-945.51 -446.72,-898.27 -399.48,-898.27 -352.24,-898.27 -304.99,-898.27 -257.75,-898.27 -210.5,-898.27 -163.26,-898.27 -116.02,-898.27
  other v3: -393,-1830 4792,-1825 -438,-1815 -348,-1815 4747,-1810 4837,-1810 -463,-1785 -318,-1785 4722,-1780 4867,-1780 -478,-1745 4877,-1740 -463,-1705 -323,-1705 4722,-1700 4862,-1700 -433,-1675 -353,-1675 4752,-1670 4832,-1670 -393,-1660 4792,-1655 4932,-334 -533,-330 4887,-319 4977,-319 -578,-315 -488,-315 4862,-289 5007,-289 -603,-285 -458,-285 4847,-249 5017,-249 -618,-245 -448,-245 4862,-209 5002,-209 -603,-205 -463,-205 4892,-179 4972,-179 -573,-175 -493,-175 4932,-164 -533,-160
NetC11_1: C11.1 R18.1 U4.4 | length 704.4
  Top Layer w20: R18.1 2267.01,-975.11 2307.01,-975.11 ; C11.1 2309.01,-769.11 2347.01,-807.11 2347.01,-935.11 2307.01,-975.11 ; U4.4@2685.65,-976.11 U4.4@2686.01,-976.11 ; U4.4 2307.01,-975.11
NetC17_2: C17.2 D7.1 Q4.1 | length 219.1
  Top Layer w40: Q4.1@2242.01,-328 2264.65,-305.35 C17.2@2264.65,-239.35 ; C17.2@2263.01,-241 C17.2@2264.65,-239.35 ; C17.2@2264.65,-234 C17.2@2264.65,-239.35 ; D7.1 2289,-215 C17.2@2264.65,-239.35
NetC18_2: C18.2 D8.1 Q2.1 | length 190.4
  Top Layer w40: Q2.1@2885.01,-337 2906.65,-315.35 C18.2@2906.65,-246.35 ; C18.2@2905.01,-248 C18.2@2906.65,-246.35 ; D8.1@2931,-168 2931,-222 C18.2@2906.65,-246.35
NetD6_1: D6.1 D6.3 L2.2 Q1.2 | length 859.2
  Top Layer w120: L2.2 2803.17,-2781 ; 2813.17,-2856 D6.1 2813.17,-2546.69 Q1.2@2899.85,-2460
NetD7_2: D7.2 R29.1 | length 105.7
  Top Layer w40: D7.2 2155.14,-66.86 R29.1@2181.01,-41
NetD8_2: D8.2 R30.2 | length 97.5
  Top Layer w40: D8.2@2797.14,-149 2797.14,-83.86 R30.2@2820.01,-61
NetD10_1: D10.1 R117.1 | length 237
  Top Layer w120: R117.1 D10.1
NetD11_2: D11.2 D14.2 L2.1 | length 520.8
  Top Layer w80: D14.2 1836.09,-2716.91 D11.2
  Top Layer w120: D14.2@1769.81,-2797 1978.01,-2797 L2.1
NetD12_1: D12.1 Q1.3 R10.1 R13.1 R14.2 | length 2403.7
  Top Layer w20: R14.2 2162.01,-2178 v1(2162.01,-2027)
  Top Layer w40: v1(2162.01,-590.11) R10.1@2167.01,-590.11 ; R13.1 2162.01,-581.11 R10.1@2170.01,-589.11
  Top Layer w120: R14.2 2251.78,-2349.77 D12.1 2457.01,-2429 2577.97,-2549.96 Q1.3@2601.01,-2549.96
  Bottom Layer w20: v1(2162.01,-2027) 2162.01,-671.11 v1(2162.01,-590.11)
NetD12_2: D12.2 Q1.1 R8.2 R13.2 | length 2251
  Top Layer w20: v1(2255.01,-503.11) 2256.12,-502 R8.2 ; v1(2297.01,-2024) 2300.01,-2024 2404.01,-2128 D12.2
  Top Layer w40: D12.2 2630.17,-2301.16 Q1.1@2630.17,-2370.04
  Bottom Layer w20: v1(2255.01,-503.11) 2255.01,-597.11 2199.01,-653.11 2199.01,-1926 v1(2297.01,-2024)
NetDS1_1: DS1.1 R1.1 | length 125.5
  Top Layer w12: R1.1 -171.99,-2503 DS1.1
NetDS2_1: DS2.1 R17.1 | length 103.2
  Bottom Layer w40: v1(3925.01,-2980) 4024.01,-2980 R17.1
NetDS3_1: DS3.1 R36.1 | length 101
  Bottom Layer w40: R36.1 v1(4269.01,-2986)
NetF5_2: F5.2 MP1584_5V.3 | length 363.6
  Bottom Layer w80: F5.2 96.01,-970 288.87,-777.14 MP1584_5V.3
NetF12_2: F12.2 MP1584_12V.3 | length 468.3
  Top Layer w80: F12.2@36.01,-901 231.01,-901 284.01,-848 284.01,-656.57 MP1584_12V.3
NetF33_2: F33.2 MP1584_3.3V.3 | length 670.4
  Top Layer w80: MP1584_3.3V.3 MP1584_3.3V.3@367.3,91.29
  Bottom Layer w80: 295.01,168 F33.2@295.01,760
  other v1: 319.01,161 269.01,162
NetF34_1: F34.1 U34.4 | length 166.6
  Top Layer w60: U34.4 F34.1@-348.14,-638.15
  Top Layer w80: F34.1@-348.14,-638.15 F34.1
NetNQ1_1: NQ1.1 R2.2 R3.2 | length 1605.7
  Top Layer w60: R2.2 R3.2 v4(2813.85,216.8)
  Bottom Layer w60: v4(2813.85,216.8) 3301.05,704 3895.01,704 3936.01,745 v4(3936.01,826)
NetNQ2_1: NQ2.1 R4.2 R5.2 | length 2913.1
  Top Layer w40: R5.2@2171.01,113 R5.2@2171.85,113.85 ; R4.2 R5.2@2171.85,113.85 ; R5.2 R5.2@2171.85,113.85 ; R5.2@2176.01,118 R5.2@2171.85,113.85
  Top Layer w60: R5.2 2171.85,262.85 2612.01,703 4486.01,703 4565.01,782 NQ2.1
NetQ5_1: Q5.1 R42.1 S2.2 | length 3901.2
  Top Layer w20: Q5.1 2561.81,-236.2 v1(2566.01,-232)
  Bottom Layer w20: v1(2566.01,-232) 3118.01,-784 3118.01,-1114 4087.01,-2083 4087.01,-3137 3973.01,-3251 3973.01,-3324 S2.2
NetR6_1: R6.1 U6.3 | length 307.6
  Top Layer w20: R6.1 2578.01,-1318.11 2619.01,-1277.11 U6.3
NetR9_1: R9.1 R15.1 U6.2 | length 521.1
  Top Layer w20: R15.1@2279.01,-1322.11 2264.01,-1307.11 R9.1 2682.65,-1230.11 U6.2
NetR16_1: R16.1 R17.2 U6.1 | length 2590.2
  Top Layer w20: U6.1@2683.65,-1178.11 2683.65,-1168.47 v1(2748.01,-1104.11)
  Bottom Layer w20: v1(2748.01,-1104.11) 3022.12,-1104.11 4035.01,-2117 R17.2@4035.01,-2900
NetR41_1: R41.1 S2.3 | length 3656.2
  Bottom Layer w20: v1(2262.01,-1139.11) 2262.01,-1608 2318.01,-1664 3506.01,-1664 3710.01,-1868 3710.01,-2952 3783.01,-3025 3783.01,-3245.2 S2.3
PWMOUT: R8.1 U4.6 | length 719.9
  Top Layer w20: U4.6 v1(2966.01,-925.11)
  Bottom Layer w20: v1(2497.01,-502) 2920.12,-925.11 v1(2966.01,-925.11)
SHOOT: JP1.12 R4.1 R29.2 | length 2374.5
  Top Layer w40: v5(2264.85,-45) R4.1
  Bottom Layer w60: JP1.12 2219.85,0 v5(2264.85,-45)
VBACK: D9.2 R7.1 R11.2 U4.2 | length 1245.5
  Top Layer w20: R7.1 2485.01,-1604.11 R11.2 2820.9,-1507.11 D9.2 ; v1(2547.01,-875.11) U4.2
  Bottom Layer w20: v1(2486.01,-1508.11) 2486.01,-936.11 v1(2547.01,-875.11)
VCAP_IN: D6.2 D10.2 F1.1 J1.1 J2.1 R7.2 R20.2 | length 5184.4
  Top Layer w20: 1660.01,-1800 1665.01,-1795 1665.01,-1730 ; R20.2 2173.01,-1746.11 2172.01,-1747.11 2381.9,-1747.11 2393.01,-1736 R7.2 ; 2281.01,-1800 2295.01,-1786 ; R7.2@2390.01,-1606.11 R7.2@2391.01,-1605.11
  Top Layer w120: D10.2 J2.1@871.41,-2085
  Top Layer w180: J2.1@871.41,-2085 871.41,-1929.6 1001.01,-1800 1660.01,-1800 2281.01,-1800 3363.01,-1800 3547.61,-1984.6 3547.61,-2125 3547.61,-2692.4 3451.01,-2789 D6.2@3069.01,-2789
VCAP_OUT: D1.2 D2.2 F1.2 J3.1 J4.1 | length 4127.1
  Top Layer w180: 3706.59,-1366 3706.59,-1493.58 3801.01,-1588 4027.01,-1588 4061.01,-1554 ; 3743.85,-885.16 3837.69,-979 4133.01,-979 4230.01,-1076 ; D1.2@3839.01,-304 3990.01,-304 4230.01,-544 ; F1.2 4061.01,-2517.7 4061.01,-1554 ; D2.2@4470.01,-304 4230.01,-544 ; 4061.01,-1554 4230.01,-1385 4230.01,-1076 ; 4230.01,-1076 4230.01,-544
VOLTAGE_CAP: C14.2 D13.2 JP1.11 R6.2 R20.1 R21.2 | length 4225.5
  Top Layer w20: v1(1728.01,-147) 1728.01,-1492 1743.01,-1507 1984.01,-1507 2053.01,-1438 D13.2 2058.12,-1397.11 2227.01,-1397.11 2266.01,-1436.11 R21.2 ; R20.1 R21.2 ; R6.2 2392.01,-1414.11 2309.31,-1414.11 R21.2
  Bottom Layer w20: JP1.11 -1,-99 1679.01,-99 v1@1732.01,-152
pads on no net: J1.MH1 J2.MH1 J3.MH1 J4.MH1 S2.0 U6.7 U34.5

## Polygon pours and split planes (outlines as drawn)
GND on Bottom Layer "GND_L02_P039" (solid, remove dead copper, pour order 39): -602.99,701.01 -602.99,-1447 3167.01,-1447 3160.01,-1440 3160.01,681.07
GND on Top Layer "GND_L01_P041" (solid, remove dead copper, pour order 41): -602.99,705.05 -602.99,-1447 3167.01,-1447 3160.01,-1440 3160.01,685.11

## Keep-outs
Keep-Out Layer:
  circle w10: c2814.3,1006.43 r68.9
  circle w10: c1628.46,1008.43 r68.9
  lines w10: -665.99,-1546 -535.99,-1676 -535.99,-1900 11.23,-1900 ; -665.67,-1545.66 cw(c-571.99,-1445) -707.73,-1467 -707.73,-176 cw(c-625.69,-171) -690.69,-120.7 -625.99,-56 -625.99,1024.49 ; -626.49,1008.99 cw(c-510.51,1012) -507.99,1128 ; -535.99,-2468 ccw(c-465.49,-2466.5) -494.95,-2530.57 ; -533.99,-2466 -533.99,-2267 11.23,-2267 11.23,-1906 ; -522.48,1128 4953.01,1128 cw(c4950.01,1014) 5064.01,1011 5064.01,244 ; -495.34,-2531.24 958.31,-3365.07 ; 959.74,-3362.58 2135.01,-3362.58 ; 2133.23,-3362.89 2660.57,-3362.89 ; 2660.57,-3363.37 cw(c2659.9,-3396.33) 2692.86,-3397 2692.86,-3926.37 ccw(c2725.82,-3927.04) 2725.15,-3960 3369.01,-3960 ; 3367.04,-3958.45 ccw(c3373.01,-3679) 3569.69,-3877.62 ; 3570.94,-3879 4924.36,-2658.75 ; 4416.14,-2310 4963.36,-2310 4963.36,-2572.79 ; 4416.14,-2304 4416.14,-1943 4961.36,-1943 4961.36,-1628.65 ; 4921.12,-2657.84 ccw(c4857.51,-2573.5) 4963.15,-2572.99 ; 4964.34,-1625.67 5024.01,-1566 ; 5017.83,-1574.39 cw(c5139.64,-1658.46) 5089.02,-1519.38 ; 5064.01,284 5064.01,-52.61 5104.01,-92.61 5104.01,-1507.89 5092.39,-1519.5 ; 5090.56,-79.16 cw(c5060.15,-118.22) 5106.48,-135.66

## Other copper
Top Layer:
  pour cut-out: 1289.01,-831 1293.01,-827 1476.01,-827 1476.01,-880 1461.01,-895 1453.01,-887 1284.01,-887
  pour cut-out: -444.99,-474 -233.99,-474 -227.99,-480 -227.99,-554.74 -441.73,-554.74 -444.99,-558
  pour cut-out: -137.99,-716 -134.99,-719 226.01,-719 226.01,-896 193.01,-863 -141.99,-863
Bottom Layer:
  pour cut-out: -389.99,-408 -388.99,-407 -31.99,-407 -31.99,-885 -34.99,-888 -363.99,-888

## Silkscreen, mask and mechanical layers (free items; w line width, h text height)
Top Overlay:
  circle w10: c2199.68,-786.43 r3464.57
  lines w10: -236.99,-3 -139.99,-3 ; -230.99,399 -148.31,399 ; -215.99,98 -134.99,98 ; -214.1,198 -138.99,198 ; -152.99,296 -201.99,296 -202.99,295 -219.99,295 -219.99,495 -216.99,498 -146.99,498 ; -84.99,-2630 -84.99,-2509 ; 0,200 116.01,200 ; 2.01,-32 2.01,-72 44.01,-114 ; 32.01,92 32.01,79 126.01,-15 ; 46.99,302 116.99,302 ; 48.31,401 130.99,401 ; 52.99,504 101.99,504 ; 119.99,305 119.99,505 ; 357.01,202 357.01,205 595.01,443 731.01,443 ; 871.41,-2085 871.41,-1896.6 ; 1349.01,-1156 1349.01,-958 ; 1421.01,-786.43 1649.44,-786.43 ; 1456.9,-3644.84 2983.75,-3645 ; 1456.9,-3640 1456.9,904 ; 2119.01,-1239 2119.01,-859 ; 2171.85,133 2171.85,262.85 ; 2254.01,-1677 2254.01,-1745.19 ; 2255.93,-1747.11 2254.01,-1745.19 ; 2286.09,-1745.19 2254.01,-1745.19 ; 2813.85,120 2813.85,254.15 ; 2983.75,-3646 2983.75,904 ; 3522.01,-710.1 3706.59,-710.1 ; 3536.11,-1179.1 3706.59,-1179.1 ; 3547.61,-2441.4 3547.61,-2125 ; 3929.01,863 3929.01,1017 ; 4565.01,863 4565.01,1018
  lines w11.81: 1459.01,906 2984.01,906
  text "SHOOT" at 4594.01,990 h60
  text "CHIP" at 3956.01,981 h60
  text "+3.3V" at 555.01,473 h60
  text "+16V" at 157.01,372 h60
  text "GND" at -391.99,370 h60
  text "SHOOT" at 2184.29,228 h60
  text "CHIP" at 2846.01,224 h60
  text "+12V" at 133.01,219 h60
  text "+3.3V" at -457.99,169 h60
  text "+5V" at -393.99,67.89 h60
  text "+5V" at 1279.01,59.89 h60
  text "VOL_CAP" at -580.99,-43 h60
  text "CHIP" at 128.01,-73 h60
  text "SHOOT" at 10.01,-177 h60
  text "CAP_IN" at 3985.01,-543 h60
  text "+12V" at -266.99,-704 h60
  text "SHOOT" at 3237.01,-756 h60
  text "+16V1" at 1459.01,-769 h60
  text "+5V1" at 1898.01,-1072 h60
  text "+16V" at 1376.01,-1152 h60
  text "CHIP" at 3349.01,-1204 h60
  text "5.1K" at 2614.01,-1529.11 h60
  text "300K" at 2621.01,-1651.11 h60
  text "VOL_CAP" at 2283.01,-1770 h60
  text "CAP_IN" at 794.01,-1866 h60
  text "CAP_IN" at 3251.01,-2327 h60
  text "+16V" at -68.99,-2615 h60
  text "CHARGING" at 4346.01,-2910 h40
  text "DONE" at 3569.01,-2953 h60
  text "ON" at 4240.01,-3238 h60 r45
  text "+" at 3275.01,-3276.14 h40
  text "+" at 1086.01,-3576 h40
Mechanical 1:
  circle w10: c1628.46,1008.43 r68.9
  circle w10: c2809.56,1008.43 r68.9
  lines w10: -707.78,-1459 -707.78,-176 ; -707.73,-1459 ccw(c-586.86,-1452.13) -664.89,-1544.69 ; -707.73,-176 cw(c-625.69,-171) -690.69,-120.69 ; -665.99,-1546 -535.99,-1676 -535.99,-1706 ; -628.41,1006.07 cw(c-507.99,1006.07) -507.99,1126.49 ; -626.51,1013 -625.99,-56 -690.69,-120.69 ; -535.99,-2269.06 9.2,-2269.06 9.2,-1900.94 -534.99,-1900.94 -534.99,-1707 ; -534.9,-2270.15 -534.9,-2475.94 ccw(c-472.49,-2472.5) -496.99,-2530 956.94,-3364.17 ; -505.99,1127.07 4944.01,1127.07 cw(c4944.01,1007.07) 5064.01,1007.07 ; 955.33,-3362.32 2136.01,-3362.32 2661.33,-3362.32 ; 2662.01,-3363 cw(c2660.51,-3394.5) 2692.01,-3396 2692.01,-3927.19 ccw(c2720.91,-3926.09) 2722.01,-3955 3396.02,-3955 ; 3394.02,-3954.44 ccw(c3396.44,-3711.32) 3576.01,-3875.23 ; 3566.91,-3883.44 4924.34,-2658.73 ; 4926.59,-2656.08 ccw(c4855.18,-2574.82) 4963.36,-2575 4963.36,-2309.12 4419.16,-2309.12 4419.16,-1941.01 4964.36,-1941.01 ; 4963.67,-1886.3 4963.67,-1636.34 5004.01,-1596 ; 4964.48,-1940.89 4964.48,-1887.11 ; 5005.21,-1596.55 cw(c5139.64,-1658.46) 5089.02,-1519.38 ; 5064.01,-52.61 5064.01,284 ; 5064.01,244 5064.01,1011 ; 5065.39,-50.61 5108.78,-94 ; 5092.39,-1519.5 5107.39,-1504.5 ; -690.69,-120.69 -690.69,-120.69 ; 5107.39,-1504.5 5107.39,-96 5107.39,-1504.5

## Text inside footprints (layer, text, board x,y; h text height)
C1: Top Overlay "+" at 289.01,-1771 h40 r90; Top Overlay "-" at 294.01,-1266 h40 r90
C2: Top Overlay "-" at -89.99,-1385 h40 r90; Top Overlay "+" at -89.99,-1720 h40 r90